# Altium PCB Fake_ACS_Board_PCB.PcbDoc
Units mil, origin at the board's own origin, x right, y up, seen from the top; angles counter-clockwise.
Board outline 865 x 761.1 mil, 2 copper layers (Top Layer, Bottom Layer); 8 components, 7 nets, 25 pads, 3 vias.
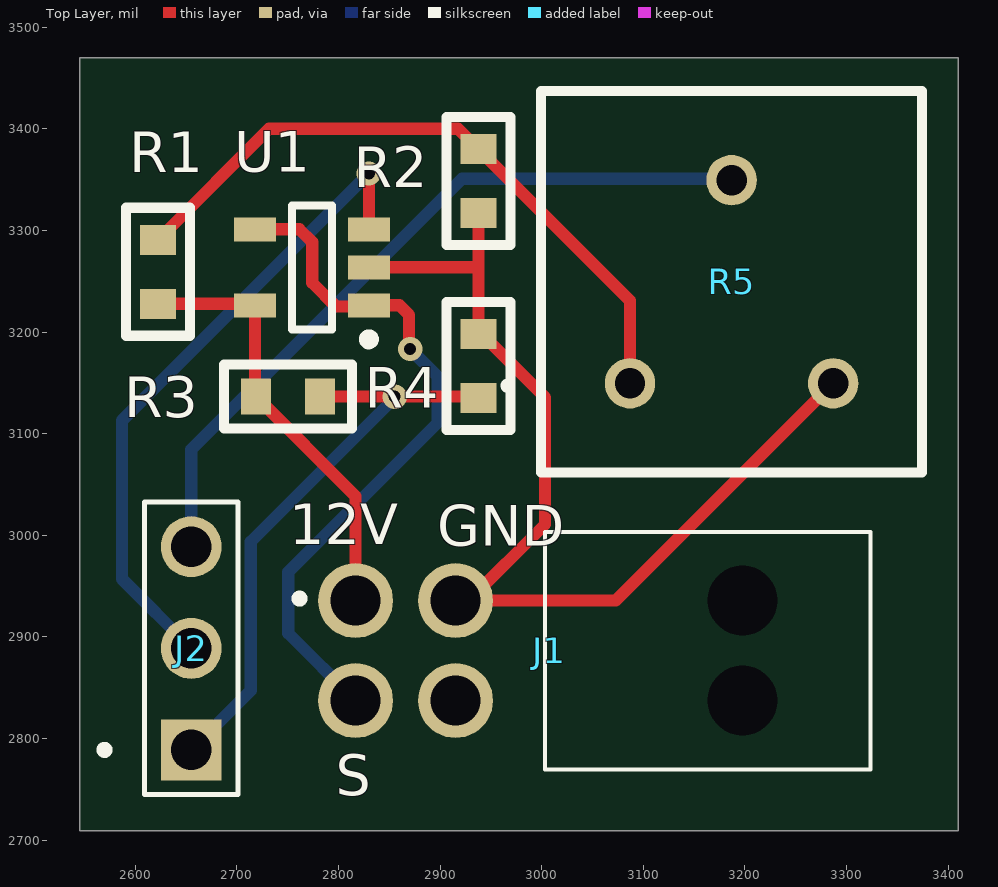
[diagram p0: Top Layer view]
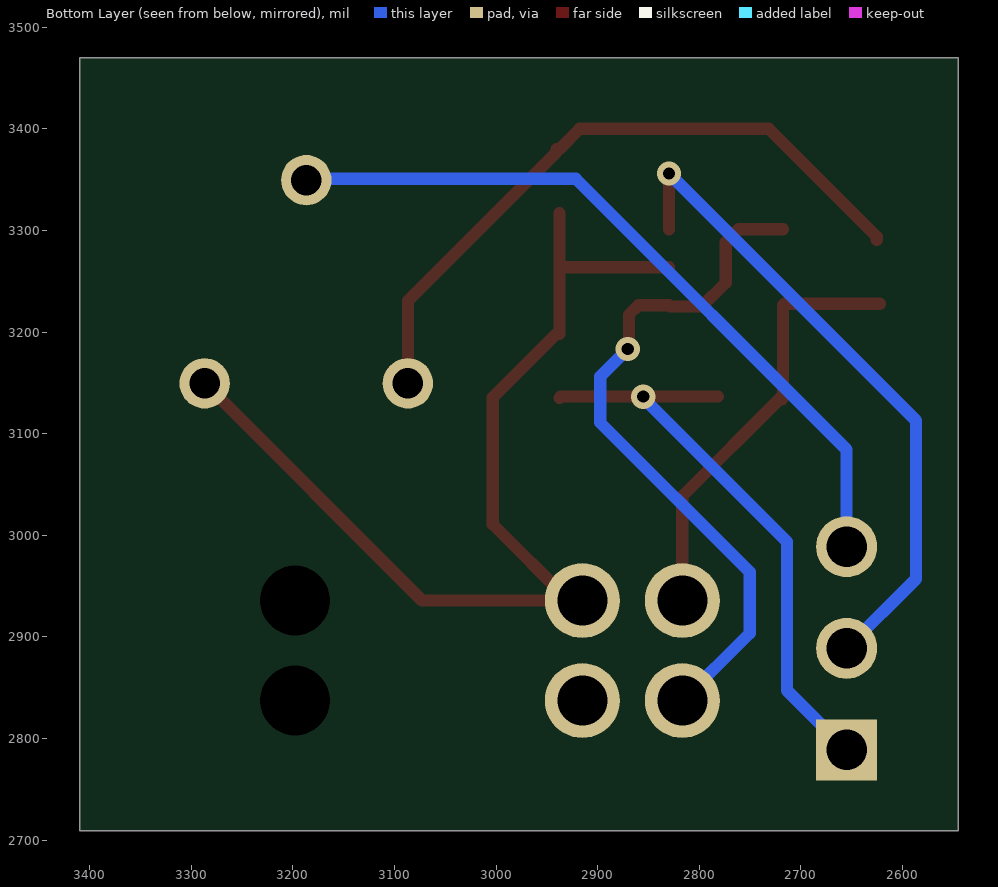
[diagram p1: Bottom Layer view, seen from below]

## Layer stack, top to bottom
Top Solder: solder mask 0.4, Solder Resist, Dk 3.5
Top Layer: signal copper 1.4
Dielectric 1: dielectric 12.6, FR-4, Dk 4.8
Bottom Layer: signal copper 1.4
Bottom Solder: solder mask 0.4, Solder Resist, Dk 3.5

## Board outline
2545,3470.2 2545,2709.1 3410,2709.1 3410,3470.2

## Design rules (kind name [scope] priority, off if disabled: settings)
Clearance [All] p1: gap=12 ignorepadtopadclearanceinfootprint=FALSE
MinimumSolderMaskSliver [All] p1: minsoldermaskwidth=6
PlaneClearance [All] p1: clearance=30
PlaneConnect [All] p1: pad.planeconnectstyle=Relief pad.reliefexpansion=20 pad.reliefentries=4 pad.reliefconductorwidth=10 pad.reliefairgap=10 via.planeconnectstyle=Direct via.reliefexpansion=20 via.reliefentries=4 via.reliefconductorwidth=10 via.reliefairgap=10
PolygonConnect PolygonConnect_Via [All vs IsVia] p1: connectstyle=Direct reliefconductorwidth=10 reliefentries=4 polygonreliefangle="90 Angle" airgapwidth=10
PolygonConnect [All] p2: connectstyle=Relief reliefconductorwidth=20 reliefentries=4 polygonreliefangle="45 Angle" airgapwidth=10
RoomDefinition Fake_ACS_Board_Schematic [InComponentClass('Fake_ACS_Board_Schematic')] p1: confinementstyle=ConfineIn formatcopy=TRUE lockcomponents=FALSE outline 2546.1,2708.1 3410,2708.1 3410,3471.3 2546.1,3471.3
RoutingVias [All] p1: holewidth=13 width=20 viastyle="Through Hole" minholewidth=13 minwidth=20 maxholewidth=30 maxwidth=50
SilkToSolderMaskClearance [IsPad] p1: minsilkscreentomaskgap=5.9 clearancetoexposedcopper=TRUE
SolderMaskExpansion [All] p1: expansion=2.95
Width [All] p1: maxlimit=50 minlimit=10 preferedwidth=10 minimp=50.000000 maximp=50.000000 favimp=50.000000
26 further rules are at their usual default settings.

## Components (designator, comment, footprint, x,y, rotation, side; value= is the part's Value field where it differs from the comment)
J1 "NanoFit4" 1053141304 2816.7,2935.7 r90 top
J2 "3-644456-3" *TE_3-644456-3 2655,2888.7 r90 top
R1 "Res1" RESC1608X06N 2622.4,3259.3 r270 top value=500
R2 "Res1" RESC1608X06N 2937.6,3348.5 r90 top value=700
R3 "Res1" RESC1608X06N 2750.1,3136.5 r180 top value=?K
R4 "Res1" RESC1608X06N 2937.6,3166.7 r270 top value=?K
R5 "3310Y-001-104L" 3310Y-001 3186.8,3249.5 r0 top
U1 "MCP6H01T-E/LT" SOT95P270X115-5N 2773.7,3263.7 r180 top

## Footprints (in the part's own frame and the unit in brackets; to place one, negate y for a bottom-side part, rotate by r counter-clockwise, add the part's x,y. Pads: shape width x height; smd on the part's side, far side on the other; paste and mask are expansions set on the pad)
3310Y-001 [mm]
  round 1.26 hole 0.76: 1(-2.54,-2.54) 2(0,2.54) 3(2.54,-2.54)
  silkscreen extent -5.65,-4.76 4.76,4.76, body extent -4.79,-5.09 4.73,4.44, height 16.8
1053141304 [mm]
  round 1.875 hole 1.25: 1(0,0) 2(-2.5,0) 3(0,-2.5) 4(-2.5,-2.5)
  round 0.875 hole 1.75: 5(-2.5,-9.68) 6(0,-9.68)
  silkscreen extent -4.22,-12.88 1.72,1.5, body extent -4.24,-14.33 1.7,0.33, height 9.35
*TE_3-644456-3 [mil]
  rect 60x60 hole 40: 1(-100,0)
  round 60 hole 40: 2(0,0) 3(100,0)
  silkscreen extent -144,-46 144,89, body extent -144,-46 144,46, height 395
RESC1608X06N [mm] "Chip Resistor, 2-Leads, Body 1.60x0.80mm, IPC Medium Density"
  rect 0.75x0.9 smd: 1(-0.8,0) 2(0.8,0)
  silkscreen extent -1.6,-0.8 1.6,0.8, body extent -0.85,-0.45 0.85,0.45, height 0.55
SOT95P270X115-5N [mm] "SOT23, 5-Leads, Body 2.90x2.70mm, Pitch 0.95mm, IPC Medium Density"
  rect 1.05x0.6 smd mask+0.075: 1(-1.425,0.95) 2(-1.425,0) 3(-1.425,-0.95) 4(1.425,-0.95) 5(1.425,0.95)
  silkscreen extent -1.55,-1.55 0.5,1.92, body extent -0.9,-1.55 0.9,1.55, height 1.15

## Part data
R1 R2 R3 R4: "Resistor", LatestRevisionDate=17-Jul-2002, LatestRevisionNote="Re-released for DXP Platform.", PackageDescription="Axial Device, Thru-Hole; 2 Leads; 0.3 in Pin Spacing", PackageReference=AXIAL-0.3, Published=8-Jun-2000, Publisher="Altium Limited"
R5: "Resistor", Manufacturer_Name=Bourns, Mouser Part Number=652-3310Y-001-104L, RS Part Number=2508317400, Datasheet Link=http://www.bourns.com/docs/Product-Datasheets/3310.pdf, Manufacturer_Part_Number=3310Y-001-104L, Mouser Price/Stock=https://www.mouser.com/Search/Refine.aspx?Keyword=652-3310Y-001-104L, RS Price/Stock=http://uk.rs-online.com/web/p/products/2508317400

## Via types
v1: diameter 24, hole 12, Top Layer to Bottom Layer, 3 vias

## Nets (pads, with @x,y where several pads share a name; then routed paths per layer and width w, separated by ;. In a path a pad name is that pad's centre, name@x,y a point inside that pad or via, vN(x,y) a via of type N, cw(c..) or ccw(c..) an arc to the next point about the centre after c; other vN are vias at no path point)
5V: R1.1 R2.2 R5.1 | length 661.7
  Top Layer w12: R1.1@2625.35,3290.8 2625.35,3293.75 2731.6,3400 2917.59,3400 R2.2 2940.55,3379.99 2940.55,3377.04 3086.7,3230.89 3086.7,3149.4 R5.1
+12: J1.1 R1.2 R3.2 U1.5 | length 430.4
  Top Layer w12: R1.2 2716.09,3227.8 U1.5 2717.6,3137.51 R3.2 ; R3.2@2718.61,3133.55 R3.2 ; J1.1 2816.7,3038.41 R3.2
GND: J1.3 R2.1 R4.1 R5.3 U1.2 | length 1007.2
  Top Layer w12: U1.2 2937.6,3263.7 ; J1.3 J1.3@2928.2,2935.7 ; R4.1 2937.6,3263.7 ; R2.1 2937.6,3263.7 ; R4.1@2940.55,3198.2 3003.3,3135.45 3003.3,3010.8 J1.3@2928.2,2935.7 ; R5.3@3287.3,3150.2 3072.8,2935.7 J1.3@2928.2,2935.7
NetJ1_2: J1.2 U1.1 U1.4 | length 688.4
  Top Layer w12: U1.4 2761.4,3301.1 2774,3288.5 2774,3248.5 2797.5,3225 2828.5,3225 U1.1 2859.9,3226.3 2869.3,3216.9 v1@2869.3,3185.2
  Bottom Layer w12: J1.2 2750.4,2903.57 2750.4,2963.7 2897.5,3110.8 2897.5,3156.2 v1(2870.4,3183.29)
NetJ2_1: J2.1 R3.1 R4.2 | length 586.7
  Top Layer w12: R3.1 2936.31,3136.5 R4.2
  Bottom Layer w12: J2.1 2713.6,2847.3 2713.6,2993.6 v1@2855.75,3135.75
  other v1: 2855.1,3136.39
NetJ2_3: J2.3 R5.2 | length 738.5
  Bottom Layer w12: J2.3 2655,3084.4 2921.5,3350.9 3185.4,3350.9 R5.2
Signal: J2.2 U1.3 | length 653.9
  Top Layer w12: U1.3 v1(2829.8,3355.99) v1@2831.8,3357.99
  Bottom Layer w12: J2.2 2586.8,2956.9 2586.8,3112.99 v1(2829.8,3355.99)
pads on no net: J1.4 J1.5 J1.6

## Polygon pours and split planes (outlines as drawn)
GND on Top Overlay (solid): 11510,3360

## Silkscreen, mask and mechanical layers (free items; w line width, h text height)
Top Overlay:
  text "12V" at 2751.4,2991.2 h40
  text "GND" at 2897.3,2989.6 h40
  text "S" at 2797,2744.1 h40
Mechanical 1:
  lines w10: 2546.1,2708.1 3410,2708.1 3410,3471.3 2546.1,3471.3 2546.1,2708.1